# Altium PCB 练习4电路板.PcbDoc
Units mm, origin at the board's own origin, x right, y up, seen from the top; angles counter-clockwise.
Board outline 58.25 x 96.25 mm, 2 copper layers (Top Layer, Bottom Layer); 32 components, 25 nets, 156 pads, 30 vias.
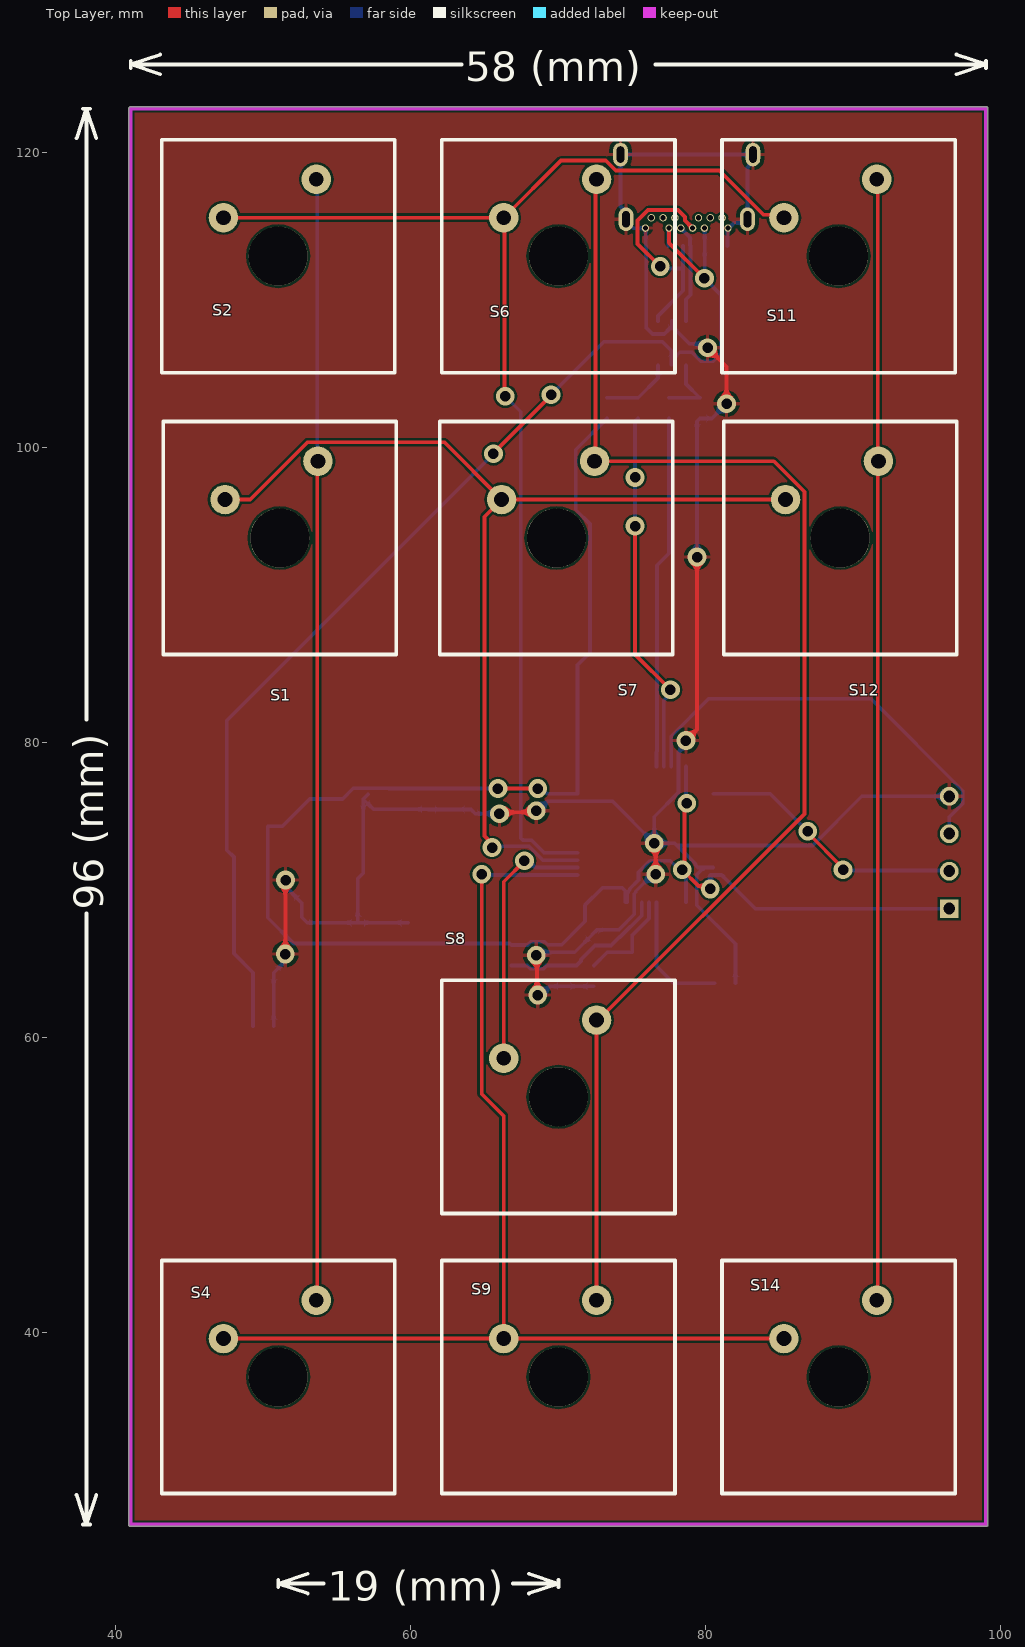
[diagram p0: Top Layer view]
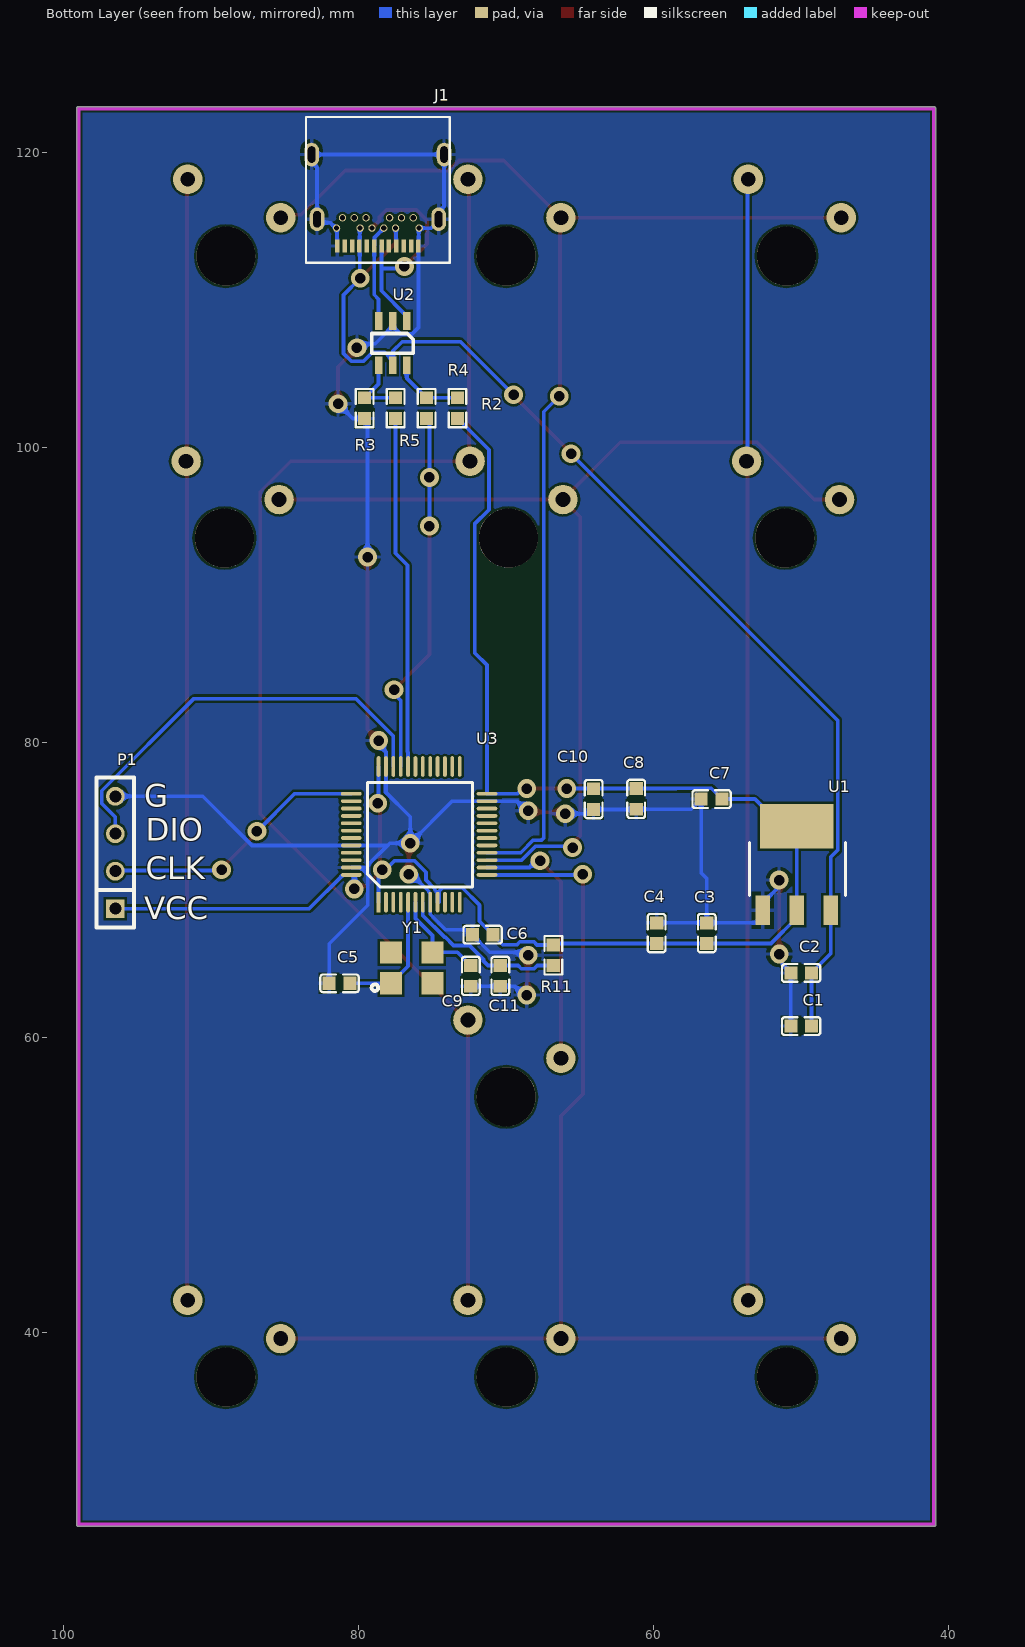
[diagram p1: Bottom Layer view, seen from below]

## Layer stack, top to bottom
Top Solder: solder mask 0.0102, Solder Resist, Dk 3.5
Top Layer: signal copper 0.0356
Dielectric 1: dielectric 0.32, FR-4, Dk 4.8
Bottom Layer: signal copper 0.0356
Bottom Solder: solder mask 0.0102, Solder Resist, Dk 3.5

## Board outline
40.873,27 ccw(c41,27) 41,26.873 99,26.873 ccw(c99,27) 99.127,27 99.127,123 ccw(c99,123) 99,123.127 41,123.127 ccw(c41,123) 40.873,123

## Design rules (kind name [scope] priority, off if disabled: settings)
Clearance [All] p1: gap=0.152 ignorepadtopadclearanceinfootprint=FALSE
PolygonConnect [All] p1: connectstyle=Relief reliefconductorwidth=0.254 reliefentries=4 polygonreliefangle="90 Angle" airgapwidth=0.254
RoutingVias [All] p1: holewidth=0.711 width=1.27 viastyle="Through Hole" minholewidth=0.711 minwidth=1.27 maxholewidth=0.711 maxwidth=1.27
SolderMaskExpansion [All] p1: expansion=0.102 istentingtop=FALSE
Width [All] p1: maxlimit=0.254 minlimit=0.254 preferedwidth=0.254
30 further rules are at their usual default settings.

## Components (designator, comment, footprint, x,y, rotation, side; value= is the part's Value field where it differs from the comment)
C1 "10UF" C0603 50,60.8 r180 bottom
C2 "100NF" C0603 50,64.4 r180 bottom
C3 "100NF" C0603 56.4,67.1 r270 bottom
C4 "10UF" C0603 59.8,67.1 r270 bottom
C5 "22PF" C0603 81.3,63.7 r180 bottom
C6 "100NF" C0603 71.6,67 r180 bottom
C7 "100NF" C0603 56.076,76.19 r180 bottom
C8 "100NF" C0603 61.19,76.2 r90 bottom
C9 "22PF" C0603 72.4,64.2 r90 bottom
C10 "100NF" C0603 64.076,76.19 r90 bottom
C11 "100NF" C0603 70.4,64.2 r90 bottom
J1 "TYPE-C_24" TYPE-C24P 75.1,114.25 r270 bottom
P1 "SIP4" SIP4 96.5,68.76 r90 bottom
R2 "4.7K" R0603 73.3,102.7 r270 bottom
R3 "4.7K" R0603 79.6,102.7 r90 bottom
R4 "10R" R0603 75.4,102.7 r270 bottom
R5 "10R" R0603 77.5,102.7 r90 bottom
R11 "1K" R0603 66.8,65.6 r90 bottom
S1 "BUTTON2" KEY 51,113 r0 top
S2 "BUTTON2" KEY 51.109,93.89 r0 top
S4 "BUTTON2" KEY 51,37 r0 top
S6 "BUTTON2" KEY 70,113 r0 top
S7 "BUTTON2" KEY 69.859,93.89 r0 top
S8 "BUTTON2" KEY 70,56 r0 top
S9 "BUTTON2" KEY 70,37 r0 top
S11 "BUTTON2" KEY 89,113 r0 top
S12 "BUTTON2" KEY 89.109,93.89 r0 top
S14 "BUTTON2" KEY 89,37 r0 top
U1 "LM1117-3.3" SOT223 50.3,71.5 r270 bottom
U2 "USBLC6-2" SOT23-6 77.7,107.1 r90 bottom
U3 "STM32F103-48" LQFP48 75.9,73.8 r180 bottom
Y1 "8M" XTAL-3225-4 76.4,64.8 r180 bottom

## Footprints (in the part's own frame and the unit in brackets; to place one, negate y for a bottom-side part, rotate by r counter-clockwise, add the part's x,y. Pads: shape width x height; smd on the part's side, far side on the other; paste and mask are expansions set on the pad)
C0603 [mm]
  rect 0.88x0.9 smd mask+0: 1(-0.7,0) 2(0.7,0)
  silkscreen extent -1.3,-0.6 1.3,0.6
KEY [mm]
  round 4 hole 4 unplated: 0(0,0)
  round 2 hole 1: 1(2.591,5.21) 2(-3.709,2.61)
  silkscreen extent -7.9,-7.9 7.9,7.9, body extent -9,-9 9,9, height 15
LQFP48 [mm]
  rect 0.254x1.4 smd: 1(-2.75,-4.6)
  oval 0.254x1.4 smd: 2(-2.25,-4.6) 3(-1.75,-4.6) 4(-1.25,-4.6) 5(-0.75,-4.6) 6(-0.25,-4.6) 7(0.25,-4.6) 8(0.75,-4.6) 9(1.25,-4.6) 10(1.75,-4.6) 11(2.25,-4.6) 12(2.75,-4.6) 25(2.75,4.6) 26(2.25,4.6) 27(1.75,4.6) 28(1.25,4.6) 29(0.75,4.6) 30(0.25,4.6) 31(-0.25,4.6) 32(-0.75,4.6) 33(-1.25,4.6) 34(-1.75,4.6) 35(-2.25,4.6) 36(-2.75,4.6)
  oval 1.4x0.254 smd: 13(4.6,-2.75) 14(4.6,-2.25) 15(4.6,-1.75) 16(4.6,-1.25) 17(4.6,-0.75) 18(4.6,-0.25) 19(4.6,0.25) 20(4.6,0.75) 21(4.6,1.25) 22(4.6,1.75) 23(4.6,2.25) 24(4.6,2.75) 37(-4.6,2.75) 38(-4.6,2.25) 39(-4.6,1.75) 40(-4.6,1.25) 41(-4.6,0.75) 42(-4.6,0.25) 43(-4.6,-0.25) 44(-4.6,-0.75) 45(-4.6,-1.25) 46(-4.6,-1.75) 47(-4.6,-2.25) 48(-4.6,-2.75)
  silkscreen extent -3.51,-3.58 3.6,3.53, body extent -4.5,-4.5 4.5,4.5, height 1.45
R0603 [mm]
  rect 0.88x0.9 smd mask+0: 1(-0.7,0) 2(0.7,0)
  silkscreen extent -1.3,-0.6 1.3,0.6, body extent -0.8,-0.41 0.8,0.41, height 0.45
SIP4 [mil]
  rect 50x50 hole 32: 1(0,0)
  round 50 hole 32: 2(100,0) 3(200,0) 4(300,0)
  silkscreen extent -50,-50 350,50, body extent -50,-50 350,50, height 335
SOT23-6 [mm]
  rect 1.2x0.5 smd: 1(1.5,-0.95) 2(1.5,0) 3(1.5,0.95) 4(-1.5,0.95) 5(-1.5,0) 6(-1.5,-0.95)
  silkscreen extent -0.69,-1.4 0.66,1.42, body extent -1.2,-1.49 1.14,1.43, height 1
SOT223 [mm]
  rect 2x1 smd: 1(2.85,-2.3) 2(2.85,0) 3(2.85,2.3)
  rect 3x5 smd: 4(-2.85,0)
  silkscreen extent -1.75,-3.2 1.85,3.3, body extent -3.44,-3.24 3.52,3.26, height 1.7
TYPE-C24P [mm]
  oval 1.6x1 hole 0.5 slot 1.1 at 0 deg: 0(-5.64,-8.09) 0(-5.64,0.89) 0(-1.25,-7.72) 0(-1.25,0.52)
  rect 0.9x0.3 smd: 1(0.56,-0.85) 2(0.56,-1.35) 3(0.56,-1.85) 4(0.56,-2.35) 5(0.56,-2.85) 6(0.56,-3.35) 7(0.56,-3.85) 8(0.56,-4.35) 9(0.56,-4.85) 10(0.56,-5.35) 11(0.56,-5.85) 12(0.56,-6.35)
  round 0.5 hole 0.35: 13(-0.65,-6.4) 14(-1.35,-6) 15(-1.35,-5.2) 16(-0.65,-4.8) 17(-1.35,-4.4) 18(-0.65,-4) 19(-0.65,-3.2) 20(-1.35,-2.8) 21(-0.65,-2.4) 22(-1.35,-2) 23(-1.35,-1.2) 24(-0.65,-0.8)
  silkscreen extent -8.18,-8.48 1.69,1.27, body extent -8.58,-8.74 1.95,1.49, height 2.58
XTAL-3225-4 [mm]
  rect 1.5x1.5 smd: 1(-1.4,-1.1) 2(1.4,-1.1) 3(1.4,1) 4(-1.4,1)
  silkscreen extent -2.72,-1.62 -2.28,-1.18, body extent -1.6,-1.25 1.6,1.25, height 0.7

## Part data
C1 C2 C3 C4 C5 C6 C7 C8 C9 C10 C11: library part C0603, "贴片电容"
P1: "连接器", LatestRevisionDate=17-Jul-2002, LatestRevisionNote="Re-released for DXP Platform.", Publisher="Altium Limited"
R2 R3 R4 R5 R11: library part R-0603, "贴片电阻"
S1 S2 S4 S6 S7 S8 S9 S11 S12 S14: "按钮", LatestRevisionDate=17-Jul-2002, LatestRevisionNote="Re-released for DXP Platform.", PackageDescription="Switch; 2 Leads", PackageReference=SPST-2, Published=24-Mar-1999, Publisher="Altium Limited"
U1: library part 1117, "芯片", LatestRevisionDate=17-Jul-2002, LatestRevisionNote="Re-released for DXP Platform.", Publisher="Altium Limited"
Y1: library part XTAL-4-W, "无源晶振", LatestRevisionDate=17-Jul-2002, LatestRevisionNote="Re-released for DXP Platform.", PackageDescription="Crystal, Thru-Hole; 2 Leads; Body 3.1 x 8.2 mm (Dia.xH)", PackageReference=R38, Published=8-Jun-2000, Publisher="Altium Limited"

## Via types
v1: diameter 1.27, hole 0.711, Top Layer to Bottom Layer, 30 vias

## Nets (pads, with @x,y where several pads share a name; then routed paths per layer and width w, separated by ;. In a path a pad name is that pad's centre, name@x,y a point inside that pad or via, vN(x,y) a via of type N, cw(c..) or ccw(c..) an arc to the next point about the centre after c; other vN are vias at no path point)
B1: U3.39
B2: U3.40
B3: U3.41
B4: U3.38
D+: R4.2 U3.33 | length 24.9
  Top Layer w0.254: v1(75.2,94.7) 75.2,86 v1(77.6,83.6)
  Bottom Layer w0.254: v1(75.2,94.7) v1(75.2,98) 75.2,101.8 R4.2 ; U3.33 77.15,82.875 77.6,83.325 v1(77.6,83.6)
D-: R5.1 U3.32 | length 24
  Bottom Layer w0.254: U3.32 76.65,79.373 76.686,79.409 76.686,92.047 77.5,92.861 R5.1
GND: C1.1 C2.1 C3.1 C4.1 C5.1 C6.1 C7.1 C8.1 C9.1 C10.1 C11.1 J1.0 J1.1 J1.12 J1.13 J1.24 P1.4 R3.1 U1.1 U2.2 U3.8 U3.23 U3.35 U3.44 U3.47 | length 177.1
  Top Layer w0.254: v1(51.485,65.681) 51.493,65.688 51.493,70.693 v1(51.5,70.7) ; v1(66,75.2) 66.1,75.3 68.4,75.3 v1(68.5,75.4) ; v1(68.5,65.6) 68.55,65.55 68.55,62.95 v1(68.6,62.9) ; v1(76.5,73.2) 76.6,73.1 v1(76.6,71.1) v1@76.6,70.7 ; v1(78.647,80.153) 79.4,80.907 v1(79.4,92.6) ; v1(80.117,106.783) 81.4,105.5 v1(81.4,103)
  Bottom Layer w0.254: C1.1 C2.1 50.7,64.41 51.291,65.001 51.291,65.487 v1(51.485,65.681) ; v1(51.5,70.7) 51.694,70.506 51.694,70.056 52.6,69.15 U1.1 52.6,68.173 52.973,67.8 C3.1 ; C7.1@57.099,76.513 57.089,76.513 56.776,76.2 C7.1 C7.1@56.776,76.18 ; C4.1 C3.1 ; C10.1 C10.1@64.066,75.49 ; v1(66,75.2) 64.356,75.2 C10.1@64.066,75.49 ; v1(68.5,65.6) 68.5,65.8 71.11,65.8 72.3,66.99 C6.1 72.3,67.01 72.613,67.323 74.098,67.323 75.15,68.375 U3.8 75.15,69.773 75.244,69.867 75.244,69.941 76.402,71.1 v1(76.6,71.1) ; v1(68.5,75.4) 68.637,75.4 69.287,76.05 U3.23 73.65,76.05 v1(76.5,73.2) ; v1(68.6,62.9) 68.837,62.9 69.437,63.5 C11.1 C9.1 ; U2.2 U2.2@77.7,108.25 ; v1(78.647,80.153) 78.647,79.878 78.15,79.382 U3.35 78.15,76.643 76.5,74.993 v1(76.5,73.2) ; v1(79.4,92.6) 79.4,101.8 R3.1 80.4,102 v1(81.4,103) ; v1(80.117,106.783) 79.834,107.066 78.884,107.066 U2.2@77.7,108.25 ; U3.47 U3.47@79.927,71.55 ; J1.12 81.473,113.713 81.473,114.873 J1.13 81.567,114.9 81.939,115.272 82.592,115.272 82.82,115.5 82.82,119.018 83.19,119.388 83.19,119.89 74.21,119.89 74.21,116.372 74.58,116.002 74.58,115.5 74.58,115.402 75.082,114.9 J1.24 75.927,114.873 75.927,113.713 J1.1 75.95,108.155 76.384,107.721 77.171,107.721 U2.2@77.7,108.25 ; C5.1 82,66.381 79.386,68.995 79.386,71.083 79.759,71.456 79.833,71.456 U3.47@79.927,71.55 ; P1.4 90.573,76.38 87.243,73.05 U3.44 78.043,73.05 ; C3.1 56.4,70.8 56.776,71.176 C7.1@56.776,76.18 ; C7.1@56.776,76.18 57.456,75.5 C8.1 61.2,75.49 C10.1@64.066,75.49 ; v1(76.5,73.2) 77.893,73.2 78.043,73.05 ; 78.043,73.05 79.314,71.779 79.314,71.699 79.463,71.55 U3.47@79.927,71.55
H1: S1.1 S2.1 S4.1 | length 76.1
  Top Layer w0.254: S4.1 53.645,42.264 53.645,99.045 S2.1
  Bottom Layer w0.254: S1.1 53.645,118.155 53.645,99.155 S2.1
H2: S6.1 S7.1 S8.1 S9.1 | length 95
  Top Layer w0.254: S9.1 S8.1 72.703,61.21 86.679,75.186 86.679,97.03 84.609,99.1 S7.1 72.52,99.17 72.52,118.139 S6.1
H3: S11.1 S12.1 S14.1 | length 76.1
  Top Layer w0.254: S14.1 91.645,42.264 91.645,99.045 S12.1 91.645,99.155 91.645,118.155 S11.1
L1: S1.2 S6.2 S11.2 U3.16 | length 88
  Top Layer w0.254: S1.2 S6.2 ; v1(66.4,103.5) 66.346,103.554 66.346,115.555 S6.2 ; S11.2 85.089,115.812 83.91,115.812 80.912,118.811 73.887,118.811 73.209,119.489 70.17,119.489 S6.2
  Bottom Layer w0.254: v1(66.4,103.5) 67.447,102.453 67.447,73.555 67.596,73.406 68.161,73.406 69.018,72.55 U3.16
L2: S2.2 S7.2 S12.2 U3.15 | length 71.7
  Top Layer w0.254: S2.2 49.112,96.5 52.991,100.379 62.271,100.379 S7.2 ; v1(65.5,72.9) 65.5,73.175 64.986,73.689 64.986,95.336 S7.2 ; S12.2 S7.2
  Bottom Layer w0.254: v1(65.5,72.9) 65.6,73 67.993,73 68.943,72.05 U3.15
L3: S8.2 U3.14 | length 17.8
  Top Layer w0.254: S8.2 66.291,70.591 v1(67.7,72)
  Bottom Layer w0.254: v1(67.7,72) 67.975,72 68.425,71.55 U3.14
L4: S4.2 S9.2 S14.2 U3.13 | length 76.6
  Top Layer w0.254: S4.2 S9.2 ; v1(64.8,71.1) 64.8,56.199 66.291,54.708 S9.2 ; S14.2 S9.2
  Bottom Layer w0.254: v1(64.8,71.1) 64.85,71.05 U3.13
NetC5_2: C5.2 U3.5 Y1.1 | length 8.8
  Bottom Layer w0.254: U3.5 76.65,64.85 Y1.1 C5.2
NetC9_2: C9.2 U3.6 Y1.3 | length 6.8
  Bottom Layer w0.254: C9.2 72.41,64.9 73.31,65.8 Y1.3 75,66.95 76.15,68.1 U3.6
NetC11_2: C11.2 R11.1 U3.7 | length 11.4
  Bottom Layer w0.254: R11.1 67.894,64.9 68.108,64.686 68.985,64.686 69.2,64.9 C11.2 71.231,64.9 71.533,65.202 71.533,65.318 72.485,66.271 73.575,66.271 74.134,66.829 74.179,66.829 75.65,68.301 U3.7
NetR2_1: R2.1 R4.1 U2.6 | length 4.9
  Bottom Layer w0.254: R2.1 R4.1 75.41,103.4 76.75,104.74 U2.6
NetR3_2: R3.2 R5.2 U2.4 | length 4.7
  Bottom Layer w0.254: R5.2 R3.2@79.59,103.4 ; U2.4 78.65,104.34 R3.2@79.59,103.4 ; R3.2 R3.2@79.59,103.4
SWCLK: P1.2 U3.37 | length 18.3
  Top Layer w0.254: v1(86.9,74) 86.9,73.9 89.3,71.5 v1(89.3,71.4)
  Bottom Layer w0.254: U3.37 84.35,76.55 v1(86.9,74) ; v1(89.3,71.4) 89.35,71.35 96.45,71.35 P1.2
SWDIO: P1.3 U3.34 | length 28.8
  Bottom Layer w0.254: U3.34 77.65,80.45 80.2,83 91.173,83 97.414,76.759 97.414,75.894 96.5,74.98 P1.3
USB5V-IN: C1.2 C2.2 J1.4 J1.9 J1.16 J1.21 U1.3 U2.5 | length 82.2
  Top Layer w0.254: v1(65.6,99.6) 65.6,99.65 69.5,103.55 v1(69.5,103.6) ; J1.21 77.5,113.9 v1(79.9,111.5)
  Bottom Layer w0.254: C1.2 C2.2 49.3,64.41 48,65.71 U1.3 48,72.255 47.521,72.734 47.521,81.521 v1(65.6,99.6) ; v1(69.5,103.6) 73.1,107.2 77.051,107.2 77.67,106.581 U2.5@77.67,105.92 ; J1.4 77.473,113.713 77.473,114.873 J1.21 ; U2.5@77.67,105.63 U2.5@77.67,105.92 ; J1.16 79.927,114.873 79.927,111.527 v1(79.9,111.5) 81.031,110.369 81.031,106.404 80.496,105.869 79.668,105.869 79.057,106.479 78.229,106.479 U2.5@77.67,105.92
USB_DM: J1.7 J1.19 U2.3 | length 6.7
  Bottom Layer w0.254: J1.19 78.927,114.273 78.927,113.713 J1.7 78.95,110.377 78.65,110.077 U2.3
USB_DP: J1.6 J1.18 U2.1 | length 15.9
  Top Layer w0.254: v1(76.9,112.3) 75.371,113.829 75.371,115.419 76.081,116.129 78.119,116.129 78.586,115.663 78.586,115.414 J1.18
  Bottom Layer w0.254: U2.1 76.75,108.95 78.45,110.65 78.45,112.17 ; v1(76.9,112.3) 77.03,112.17 78.45,112.17 ; J1.6@78.473,113.713 J1.6 78.45,112.17
VCC: C3.2 C4.2 C6.2 C7.2 C8.2 C10.2 P1.1 R2.2 R11.2 U1.2 U1.4 U3.1 U3.9 U3.24 U3.36 U3.48 | length 119.8
  Top Layer w0.254: v1(65.9,76.9) v1(68.6,76.9) ; v1(78.7,75.9) 78.55,75.75 78.55,71.55 v1(78.4,71.4) 79.506,70.294 80.106,70.294 v1(80.3,70.1)
  Bottom Layer w0.254: v1(65.9,76.9) 64.086,76.9 C10.2 64.066,76.9 C8.2 58.491,76.9 58.471,76.92 56.096,76.92 55.376,76.2 C7.2 53.14,76.19 51.3,74.35 U1.4 U1.2 50.3,68.15 52.05,66.4 C3.2 C4.2 66.7,66.4 R11.2 67.907,66.3 68.121,66.514 69.076,66.514 69.273,66.318 70.228,66.318 70.9,66.99 70.9,67.01 71.802,67.912 71.802,68.999 72.982,70.179 74.318,70.179 74.556,69.941 74.556,69.773 74.556,69.2 U3.9 74.65,69.773 74.744,69.867 74.744,69.941 74.837,70.035 74.837,70.11 75.436,70.708 75.436,71.229 76.221,72.014 77.578,72.014 78.192,71.4 v1(78.4,71.4) 78.355,71.355 78.355,71.145 78.65,70.85 U3.1 ; v1(68.6,76.9) 68.875,76.9 69.225,76.55 U3.24 71.3,85.273 72.138,86.111 72.138,94.834 71.171,95.802 71.171,99.881 73.29,102 R2.2 ; U3.36 78.65,75.95 v1(78.7,75.9) ; v1(80.3,70.1) 80.3,71.05 U3.48 81.073,71.05 83.363,68.76 P1.1
pads on no net: J1.2 J1.3 J1.5 J1.8 J1.10 J1.11 J1.14 J1.15 J1.17 J1.20 J1.22 J1.23 S1.0 S2.0 S4.0 S6.0 S7.0 S8.0 S9.0 S11.0 S12.0 S14.0 U3.2 U3.3 U3.4 U3.10 U3.11 U3.12 U3.17 U3.18 U3.19 U3.20 U3.21 U3.22 U3.25 U3.26 U3.27 U3.28 U3.29 U3.30 U3.31 U3.42 U3.43 U3.45 U3.46 Y1.2 Y1.4

## Polygon pours and split planes (outlines as drawn)
GND on Top Layer "1" (solid, remove dead copper, pour order 0): 41,123 98.7,123 98.8,122.9 98.8,26.9 41.1,26.9 41,27
GND on Bottom Layer "1" (solid, remove dead copper, pour order 2): 41,123 99,123 99,27.4 98.8,27.2 41.2,27.2 41,27

## Keep-outs
Keep-Out Layer:
  lines w0.254: 44,123 41,123 ; 41,27 41,123 ; 41,27 99,27 ; 41,27 41,123 ; 41,27 99,27 ; 41,123 99,123 ; 41,123 99,123 ; 99,27 99,123 ; 99,27 99,123

## Silkscreen, mask and mechanical layers (free items; w line width, h text height)
Top Overlay:
  lines w0.254: 37.333,29 38,27 ; 37.333,121 38,123 ; 37.746,27 38.254,27 ; 37.746,123 38.254,123 ; 38,68.429 38,27 ; 38,81.571 38,123 ; 38.667,29 38,27 ; 38.667,121 38,123 ; 41,125.746 41,126.254 ; 43,125.333 41,126 ; 43,126.667 41,126 ; 51,22.746 51,23.254 ; 53,22.333 51,23 ; 53,23.667 51,23 ; 54.096,23 51,23 ; 63.429,126 41,126 ; 66.904,23 70,23 ; 68,22.333 70,23 ; 68,23.667 70,23 ; 70,22.746 70,23.254 ; 76.571,126 99,126 ; 97,125.333 99,126 ; 97,126.667 99,126 ; 99,125.746 99,126.254
  text "58 (mm)" at 63.683,124.848 h2
  text "96 (mm)" at 39.152,68.683 h2 r90
  text "19 (mm)" at 54.35,21.848 h2
Bottom Overlay:
  text "G" at 94.546,75.654 h1.52
  text "DIO" at 94.446,73.354 h1.52
  text "CLK" at 94.446,70.754 h1.52
  text "VCC" at 94.546,68.054 h1.52